# Altium PCB GateDriver.PcbDoc
Units mil, origin at the board's own origin, x right, y up, seen from the top; angles counter-clockwise.
Board outline 1870 x 625 mil, 2 copper layers (Top Layer, Bottom Layer); 12 components, 12 nets, 38 pads, 6 vias.
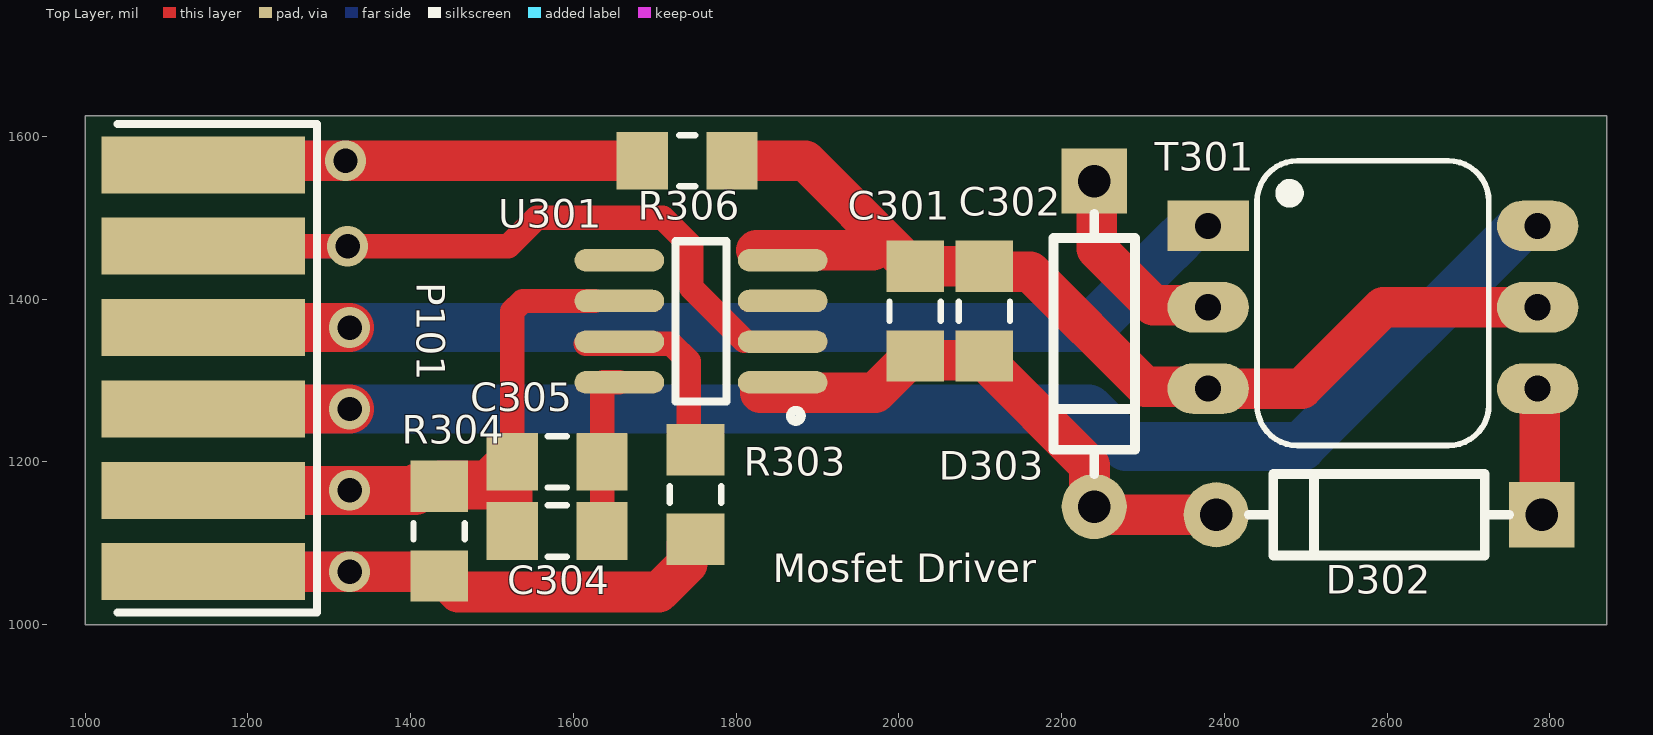
[diagram p0: Top Layer view]
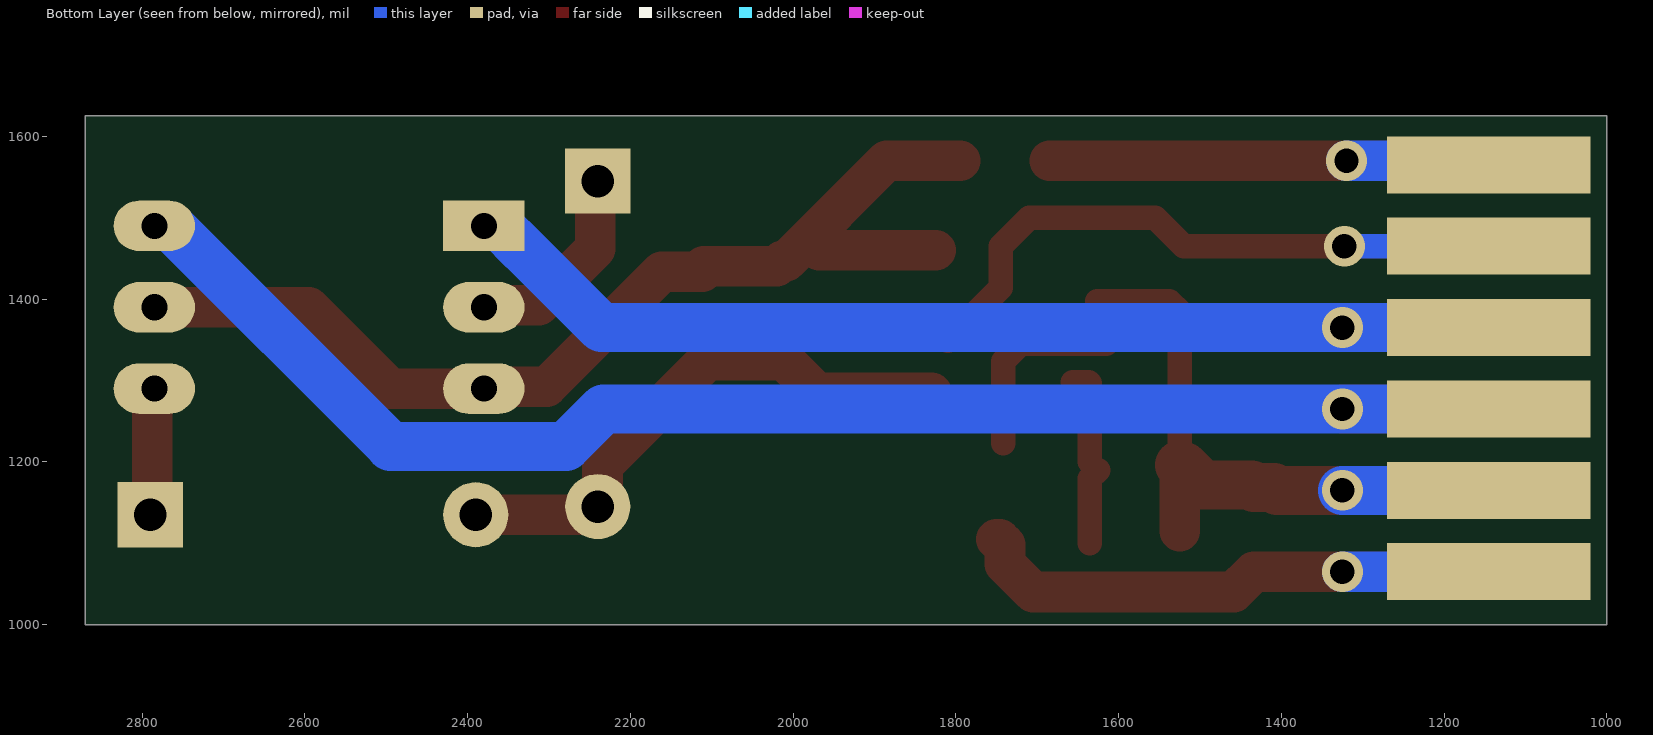
[diagram p1: Bottom Layer view, seen from below]

## Layer stack, top to bottom
Top Solder: solder mask 0.4, Solder Resist, Dk 3.5
Top Layer: signal copper 1.4
Dielectric 1: dielectric 12.6, FR-4, Dk 4.8
Bottom Layer: signal copper 1.4
Bottom Solder: solder mask 0.4, Solder Resist, Dk 3.5

## Board outline
1000,1000 1000,1625 2870,1625 2870,1000

## Design rules (kind name [scope] priority, off if disabled: settings)
Clearance [All] p1: gap=10 ignorepadtopadclearanceinfootprint=TRUE
PolygonConnect [All] p1: connectstyle=Relief reliefconductorwidth=10 reliefentries=4 polygonreliefangle="90 Angle" airgapwidth=10
RoutingVias [All] p1: holewidth=28 width=50 viastyle="Through Hole" minholewidth=28 minwidth=50 maxholewidth=28 maxwidth=50
SolderMaskExpansion [All] p1: expansion=4 istentingtop=FALSE
SupplyNets "Schematic Supply Nets_1" [InNet('ISO_GND')] p1: voltage=0.000
SupplyNets "Schematic Supply Nets" [InNet('ISO_15V')] p2: voltage=0.000
Width [All] p1: maxlimit=200 minlimit=10 preferedwidth=50 minimp=50.000000 maximp=50.000000 favimp=50.000000
30 further rules are at their usual default settings.

## Components (designator, comment, footprint, x,y, rotation, side; value= is the part's Value field where it differs from the comment)
C301 "100n" CAP_1206 2020,1440.24 r270 top
C302 "10u" CAP_1206 2105,1440.24 r270 top
C304 "10u" CAP_1206 1525,1115 r0 top
C305 "100n" CAP_1206 1525,1200 r0 top
D302 "1N5819" DIODE0.4_AUT 2790,1135 r180 top
D303 "1N5819" DIODE0.4_AUT 2240,1545 r270 top
P101 "EBC06DCWN" "6 Pose edge Connector" 1145,1065 r90 top
R303 "100R" RES_1206 1750,1215 r270 top
R304 "12K" RES_1206 1435,1059.76 r90 top
R306 "0R" RES_1206 1795,1570 r180 top
T301 "78602/9C" DIP6W_AUT 2330,1209 r0 top
U301 "FAD7171MX" SOIC8-M 1755,1375 r180 top

## Footprints (in the part's own frame and the unit in brackets; to place one, negate y for a bottom-side part, rotate by r counter-clockwise, add the part's x,y. Pads: shape width x height; smd on the part's side, far side on the other; paste and mask are expansions set on the pad)
"6 Pose edge Connector" [mil]
  rect 70x250 all layers, no hole: 1(0,0) 2(100,0) 3(200,0) 4(300,0) 5(400,0) 6(500,0)
  silkscreen extent -50,-140 550,105
CAP_1206 [mm] "Body 3.2 x 1.6 mm (LxW typ)"
  rect 1.6x1.8 smd: 1(0,0) 2(2.8,0)
  silkscreen extent 1.1,-0.8 1.7,0.8, body extent -0.15,-0.81 3.05,0.79, height 1.6
DIODE0.4_AUT [mil] "Diode, Axial; Body 5.2 x 2.7 mm (LxDia. max), Pin Distance, 400mil"
  rect 80x80 hole 40: A(0,0)
  round 80 hole 40: K(400,0)
  silkscreen extent 40,-50 360,50, body extent -18,-54 416,53, height 107
DIP6W_AUT [mil] "Wide DIL transformer"
  rect 100x62 hole 32: 1(50,281)
  oval 100x62 hole 32: 2(50,181) 3(50,81) 4(455,81) 5(455,181) 6(455,281)
  silkscreen extent 110,11 395,361
RES_1206 [mm] "Body 3.2 x 1.6 mm (LxW typ)"
  rect 1.6x1.8 smd: 1(0,0) 2(2.8,0)
  silkscreen extent 1.14,-0.8 1.65,0.8, body extent -0.21,-0.8 2.96,0.75, height 0.6
SOIC8-M [mm]
  oval 2.8x0.7 smd: 1(-2.596,1.963) 2(-2.596,0.693) 3(-2.596,-0.577) 4(-2.596,-1.847) 5(2.504,-1.847) 6(2.504,-0.577) 7(2.504,0.693) 8(2.504,1.963)
  silkscreen extent -3.17,-2.44 0.75,3.17, body extent -3.11,-2.39 3.02,2.5, height 1.76

## Part data
C301 C302 C304 C305: library part "CAPN 1206", "Non Polarized Capacitor, SMD, 1206"
D302 D303: "Schottky Diode, 1A,40v", Supplier Part Number 1=1017589, Supplier 1=Farnell
P101: library part EdgeConnector, "6 Position male Connector Non Specified - Dual Edge Gold 0.100\" (2.54mm) Blue"
R303 R304 R306: library part "Resistor 1206", "Resistor, SMD, 1206"
T301: "Pulse transformer 1:1:1"
U301: "High-Side Gate Driver IC Non-Inverting PG-DSO-8 / 8-SOIC (0.154\", 3.90mm Width) / https://www.digikey.co.nz/en/products/detail/onsemi/FAD7171MX/24627314"

## Via types
v1: diameter 50, hole 30, Top Layer to Bottom Layer, 6 vias

## Nets (pads, with @x,y where several pads share a name; then routed paths per layer and width w, separated by ;. In a path a pad name is that pad's centre, name@x,y a point inside that pad or via, vN(x,y) a via of type N, cw(c..) or ccw(c..) an arc to the next point about the centre after c; other vN are vias at no path point)
GateDriver: 
GND: 
InputSignal: 
ISO_15V: 
ISO_GND: 
NetC304_2: 
NetD302_A: 
NetD303_A: 
NetR303_1: 
PulseN: 
PulseP: 
Source: 
pads on no net: C301.1 C301.2 C302.1 C302.2 C304.1 C304.2 C305.1 C305.2 D302.A D302.K D303.A D303.K P101.1 P101.2 P101.3 P101.4 P101.5 P101.6 R303.1 R303.2 R304.1 R304.2 R306.1 R306.2 T301.1 T301.2 T301.3 T301.4 T301.5 T301.6 U301.1 U301.2 U301.3 U301.4 U301.5 U301.6 U301.7 U301.8
copper on no net: | length 9801.1
  Top Layer w30: 1125,1465 v1(1322.5,1465) 1520,1465 1555,1500 1710,1500 1745,1465 1745,1413.74 1809.8,1348.94 ; 1525,1200 1525,1385 1537.72,1397.72 1626.42,1397.72 ; 1615,1345 1720,1345 1741.54,1323.46 1741.54,1223.07 ; 1625.22,1189.59 1635.24,1179.57 1635.24,1115 1635.24,1100 ; 1635.24,1200 1635.24,1296.5 1636.46,1297.72 1656.42,1297.72
  Top Layer w50: 1125,1065 v1(1325,1065) 1433.7,1065 1458.7,1040 1705,1040 1739.57,1074.57 1739.57,1098.27 1746.06,1104.76 1750,1104.76 ; 1125,1565 1130,1570 v1(1320,1570) 1684.76,1570 ; 1525,1115 1525,1196.06 1525,1200 ; 1795,1570 1885,1570 2008.27,1446.73 2013.5,1446.73 2020,1440.24 2105,1440.24 ; 1825,1460 1967.72,1460 ; 1830,1285 1971.06,1285 2009.57,1323.5 2013.5,1323.5 2020,1330 ; 2020,1325 2105,1325 2234.26,1195.74 2234.26,1150.74 2240,1145 2248.12,1145 2258.12,1135 2390,1135 ; 2109.76,1440.24 2105,1440.24 ; 2240,1545 2243.03,1541.97 2243.03,1461.97 2312.7,1392.3 2377.7,1392.3 2380,1390 ; 2367.7,1292.3 2302.7,1292.3 2161.26,1433.74 2111.5,1433.74 2105,1440.24 ; 2380,1290 2495,1290 2595,1390 2785,1390 ; 2785,1290 2787.5,1287.5 2787.5,1137.5 2790,1135
  Top Layer w60: 1125,1165 v1(1325,1165) 1405.5,1165 1409,1168.5 1433.5,1168.5 1435,1170 ; 1125,1265 v1(1325,1265) ; 1135,1365 v1(1325,1365) ; 1436.5,1171.5 1496.5,1171.5 1519.57,1194.57 1523.5,1194.57 1525,1196.06
  Bottom Layer w30: 1145,1465 v1(1322.5,1465)
  Bottom Layer w50: 1145,1065 v1(1325,1065) ; 1145,1565 1150,1570 v1(1320,1570)
  Bottom Layer w60: 1145,1165 v1(1325,1165) ; 1145,1265 v1(1325,1265) 2233.14,1265 2279.14,1219 2494.59,1219 2765.59,1490 2785,1490 ; 1145,1365 v1(1325,1365) 2235.59,1365 2331.59,1461 2332,1461 2360,1489 2379,1489 2380,1490

## Silkscreen, mask and mechanical layers (free items; w line width, h text height)
Top Overlay:
  text "Mosfet Driver" at 1845,1040.61 h60
Mechanical 1:
  the board outline again, w5.91